# Altium PCB FLIR LWIR.PcbDoc (part 3 of 5)
Units mil, origin at the board's own origin, x right, y up, seen from the top; angles counter-clockwise.
Board outline 1511 x 3115 mil, 2 copper layers (Top Layer, Bottom Layer); 105 components, 128 nets, 625 pads, 229 vias.
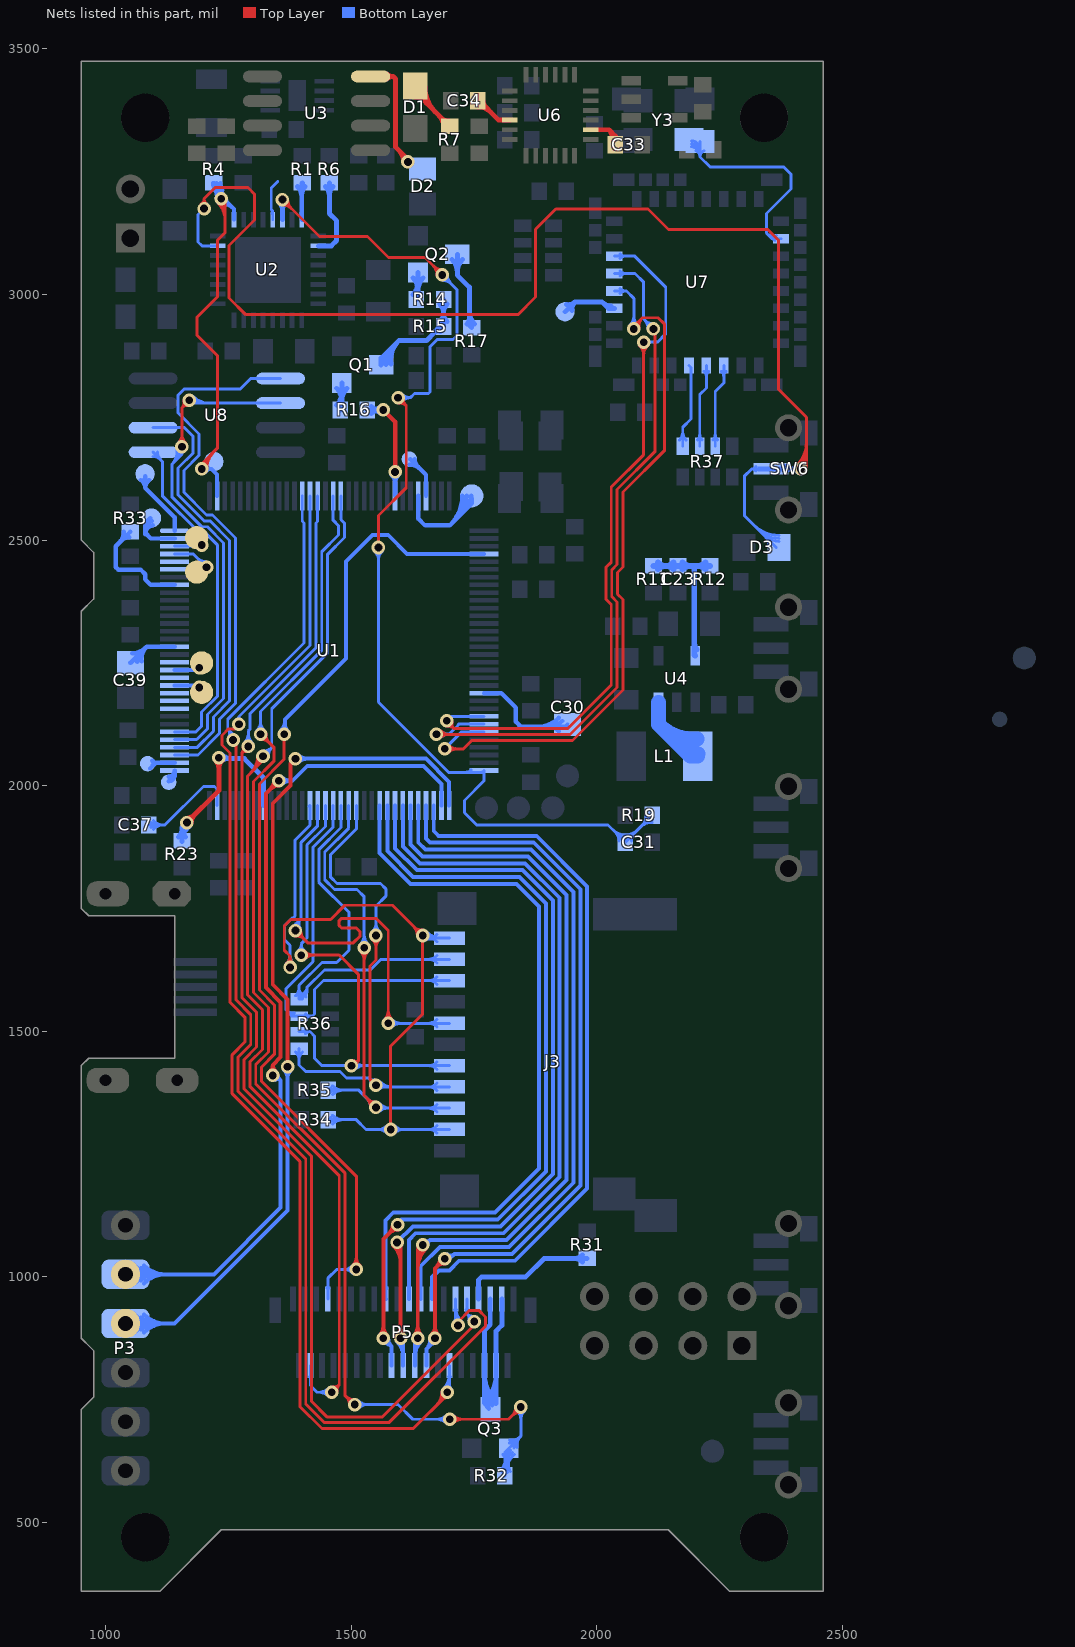
[diagram p3: the nets of this part, all layers, seen from the top]

## Via types
v1: diameter 27.56, hole 15.75, Top Layer to Bottom Layer, tented both sides, 229 vias

## Nets (pads, with @x,y where several pads share a name; then routed paths per layer and width w, separated by ;. In a path a pad name is that pad's centre, name@x,y a point inside that pad or via, vN(x,y) a via of type N, cw(c..) or ccw(c..) an arc to the next point about the centre after c; other vN are vias at no path point) (continued)
LCD_BK: Q3.1 R32.1 U1.17 | length 3293.7
  Top Layer w6: v1@1315,2094.22 cw(c1315,2068.2) 1333.4,2086.6 cw(c1351.8,2105) v1@1325.78,2105 ; v1(1315,2105) 1342.78,2077.22 1342.78,2050.56 1300.78,2008.56 1300.78,1578.85 1331,1548.63 1331,1457.98 1305.22,1432.2 1305.22,1392.81 1487.22,1210.81 1487.22,757.78 ; 1490.01,754.99 cw(c1475.02,740) v1@1496.22,740 ; v1@1505,740 1487.22,757.78 ; v1@1506.19,750.75 cw(c1504.36,774.92) 1487.22,757.78 ; v1(1700,710) 1820,710 v1(1845,735) ; v1@1707.62,702.38 cw(c1726.02,683.98) 1726.02,710 cw(c1726.02,736.02) v1@1707.62,717.62 ; v1@1834.22,735 cw(c1808.2,735) 1826.6,716.6 cw(c1845,698.2) v1@1845,724.22
  Bottom Layer w6: v1@1307.38,2112.62 ccw(c1288.98,2131.02) 1315,2131.02 ccw(c1341.02,2131.02) v1@1322.62,2112.62 ; v1@1320,2100 v1(1315,2105) 1315,2151.06 1439.63,2275.69 1439.63,2476.41 1473.78,2510.56 1473.78,2529.44 1462.87,2540.34 U1.17@1462.87,2589.96 ; v1(1507,740) 1595,740 1625,710 v1(1700,710) ; v1@1514.62,732.38 cw(c1533.02,713.98) 1533.02,740 cw(c1533.02,766.02) v1@1514.62,747.62 ; v1@1692.38,702.38 ccw(c1673.98,683.98) 1673.98,710 ccw(c1673.98,736.02) v1@1692.38,717.62 ; R32.1@1803.54,605.98 ccw(c1781.78,627.75) 1812.56,627.75 ccw(c1843.34,627.75) R32.1@1821.57,605.98 ; R32.1@1805.98,607.89 ccw(c1794.86,626.34) 1815.77,621.15 ; R32.1@1806.94,608.41 ccw(c1795.3,632.12) 1820.81,625.28 ; R32.1@1807.79,601.74 ccw(c1796.27,613.26) 1812.56,613.26 ccw(c1828.85,613.26) R32.1@1817.33,601.74 ; Q3.1@1808.1,638.61 cw(c1797.33,627.84) 1812.56,627.84 ; R32.1@1809.58,603.03 ccw(c1803.03,616.37) R32.1@1817.39,612.52 ; R32.1@1812.56,594.49 cw(c1872,594.49) Q3.1@1831.66,638.15 ; R32.1@1812.56,595 1812.56,643.07 Q3.1@1820.12,650.63 1845,675.51 ; R32.1@1812.56,608.21 cw(c1859.33,608.21) Q3.1@1827.58,642.55 ; 1812.56,621.92 cw(c1846.65,621.92) Q3.1@1823.51,646.96 ; 1814.1,614.42 ccw(c1827.53,611.09) R32.1@1817.47,601.6 ; 1816.75,625.09 ccw(c1837.03,620.06) R32.1@1821.83,605.72 ; 1820.74,625.04 ccw(c1848.36,617.64) R32.1@1823.6,603.34 ; Q3.1@1821.38,661.56 ccw(c1823.45,679.5) 1836.22,666.73 ccw(c1848.99,653.96) Q3.1@1831.05,651.89 ; Q3.1@1822.06,667.52 ccw(c1825.26,695.25) 1845,675.51 ; Q3.1@1837.01,652.58 cw(c1864.74,655.77) 1845,675.51 ; v1@1837.38,727.38 cw(c1818.98,708.98) 1845,708.98 cw(c1871.02,708.98) v1@1852.62,727.38 ; v1(1845,735) 1845,675.51
LCD_CS: P5.4 U1.18 | length 2287.6
  Top Layer w6: 1295.39,2026.61 ccw(c1262,2060) v1@1309.22,2060 ; 1305.63,2036.85 ccw(c1282.49,2060) v1@1315.22,2060 ; v1(1320,2060) 1320,2051.22 1288.78,2020 1288.78,1573.88 1319,1543.65 1319,1462.96 1293.22,1437.18 1293.22,1387.84 1475.22,1205.84 1475.22,780.22 ; v1(1460,765) 1475.22,780.22 ; v1@1461.54,775.67 ccw(c1463.84,791.6) 1475.22,780.22 ; v1@1470.67,766.54 cw(c1486.6,768.84) 1475.22,780.22
  Bottom Layer w6: v1(1320,2060) 1337.78,2077.78 ; v1@1320.27,2070.78 ccw(c1320.86,2094.7) 1337.78,2077.78 ; v1@1330.78,2060.27 cw(c1354.7,2060.86) 1337.78,2077.78 ; P5.4@1414.4,797.43 cw(c1409.44,792.47) 1416.46,792.47 cw(c1423.47,792.47) P5.4@1418.51,797.43 ; P5.4@1416.46,819.17 1416.46,778.54 1430,765 v1(1460,765) ; v1@1452.38,757.38 ccw(c1433.98,738.98) 1433.98,765 ccw(c1433.98,791.02) v1@1452.38,772.62 ; U1.18@1478.62,2589.96 1478.62,2541.56 1485.78,2534.41 1485.78,2505.59 1451.63,2471.44 1451.63,2270.72 1337.78,2156.87 1337.78,2077.78
LCD_D0: P5.17 U1.74 | length 1523.1
  Bottom Layer w8: U1.74@1557.36,1960.04 1557.36,1862.64 1620,1800 1836.41,1800 1882,1754.41 1882,1220.59 1792.19,1130.78 1585.15,1130.78 1569.22,1114.85 1569.22,955.78 P5.17@1570,955 ; 1569.22,981.17 ccw(c1576.48,981.17) P5.17@1571.35,976.03
LCD_D1: P5.18 U1.73 | length 1774.3
  Top Layer w8: v1@1558.08,881.92 ccw(c1541.39,898.61) 1565,898.61 ccw(c1588.61,898.61) v1@1571.92,881.92 ; v1(1565,875) 1565,1077 v1(1594,1106) ; v1@1584.22,1106 cw(c1560.61,1106) 1577.31,1089.31 cw(c1594,1072.61) v1@1594,1096.22
  Bottom Layer w8: v1@1565,865.22 cw(c1565,841.61) 1581.69,858.31 cw(c1598.39,875) v1@1574.78,875 ; v1(1565,875) 1581.81,858.19 P5.18@1581.81,819.17 ; U1.73@1573.11,1960.04 1573.11,1866.69 1625.8,1814 1842.21,1814 1896,1760.21 1896,1214.79 1797.99,1116.78 1601.78,1116.78 v1@1590,1105
LCD_D2: P5.20 U1.72 | length 1788.4
  Top Layer w8: v1@1586.08,1063.08 cw(c1552.49,1029.49) 1600,1029.49 ; v1@1591.74,1068.74 cw(c1571.8,1048.8) 1600,1048.8 ; v1(1593,1070) 1600,1063 v1(1600,875) ; v1@1593.08,881.92 ccw(c1576.39,898.61) 1600,898.61 ccw(c1623.61,898.61) v1@1606.92,881.92
  Bottom Layer w8: U1.72@1588.86,1960.04 1588.86,1872.54 1633.4,1828 1848.01,1828 1910,1766.01 1910,1208.99 1803.79,1102.78 1624.98,1102.78 1593,1070.8 v1(1593,1070) ; v1@1593.08,868.08 cw(c1563.28,838.28) P5.20@1605.43,838.28 ; v1@1598.74,873.74 cw(c1582.59,857.59) 1605.43,857.59 ; v1(1600,875) 1605.43,869.57 P5.20@1605.43,819.17
LCD_D3: P5.21 U1.71 | length 1494.9
  Bottom Layer w8: U1.71@1604.61,1960.04 1604.61,1876.59 1639.2,1842 1853.8,1842 1924,1771.8 1924,1203.2 1809.58,1088.78 1630.78,1088.78 1617.24,1075.24 P5.21@1617.24,955
LCD_D4: P5.22 U1.70 | length 1819.1
  Top Layer w8: v1@1628.08,881.92 ccw(c1611.39,898.61) 1635,898.61 ccw(c1658.61,898.61) v1@1641.92,881.92 ; v1(1635,875) 1635,1055 ; 1635,1017.25 cw(c1692.75,1017.25) v1@1651.92,1058.08 ; 1635,1036.56 cw(c1673.44,1036.56) v1@1646.26,1063.74 ; v1@1636.09,1060.97 cw(c1631.23,1058.77) 1635,1055 ; v1@1640.97,1056.09 ccw(c1638.77,1051.23) 1635,1055 ; v1(1645,1065) 1635,1055
  Bottom Layer w8: U1.70@1620.35,1960.04 1620.35,1880.65 1645,1856 1859.6,1856 1938,1777.6 1938,1197.4 1815.38,1074.78 1660,1074.78 ; P5.22@1629.05,819.17 1629.05,869.05 v1(1635,875) ; P5.22@1629.05,837.04 cw(c1672.96,837.04) v1@1641.92,868.08 ; 1629.05,856.35 cw(c1653.65,856.35) v1@1636.26,873.74 ; v1(1645,1065) 1650.22,1065 1660,1074.78 ; v1@1649.91,1073.46 ccw(c1654.09,1080.68) 1660,1074.78 ; v1@1654.78,1065 cw(c1665.79,1065) 1658,1072.78
LCD_D5: P5.23 U1.69 | length 1473.1
  Bottom Layer w8: U1.69@1636.1,1960.04 1636.1,1884.7 1650.8,1870 1865.4,1870 1952,1783.4 1952,1191.6 1821.18,1060.78 1680.15,1060.78 1640.87,1021.5 P5.23@1640.87,955
LCD_D6: P5.24 U1.68 | length 1716.6
  Top Layer w8: v1@1663.08,881.92 ccw(c1646.39,898.61) 1670,898.61 ccw(c1693.61,898.61) v1@1676.92,881.92 ; v1(1670,875) 1670,1017 v1(1690,1037) ; v1@1680.22,1037 cw(c1656.61,1037) 1673.31,1020.31 cw(c1690,1003.61) v1@1690,1027.22
  Bottom Layer w8: U1.68@1651.85,1960.04 1651.85,1892.15 1660,1884 1871.2,1884 1966,1789.2 1966,1185.8 1826.98,1046.78 1710,1046.78 ; P5.24@1652.68,819.17 1652.68,852.68 ; v1@1660.27,874.01 cw(c1634.02,871.34) 1652.68,852.68 ; 1661.84,861.84 cw(c1670,853.68) v1@1670,865.22 ; v1@1670,870 1652.68,852.68 ; v1(1690,1037) 1700.22,1037 1710,1046.78 ; v1@1695.31,1045.22 ccw(c1701.68,1055.09) 1710,1046.78
LCD_D7: P5.25 U1.67 | length 1461.4
  Bottom Layer w8: P5.25@1664.49,955 1664.49,999.49 1678.22,1013.22 1699.85,1013.22 1719.41,1032.78 1832.78,1032.78 1980,1180 1980,1795 1877,1898 1677,1898 1667.6,1907.4 U1.67@1667.6,1960.04
LCD_RD: P5.29 U1.13 | length 2722.2
  Top Layer w6: v1@1264.78,2087.22 1264.78,1563.93 1295,1533.71 1295,1472.9 1269.22,1447.12 1269.22,1377.9 1407,1240.12 1407,741.03 1445.03,703 1576.22,703 1772.78,899.56 1772.78,918.44 1759.44,931.78 1740.56,931.78 1717,908.22 v1@1717,902 ; v1@1715,900 v1@1717,902 ; v1(1717,901) v1@1717,902
  Bottom Layer w6: v1@1249.97,2098.88 ccw(c1238.8,2106.15) 1248.22,2115.56 ; 1253.45,2110.33 cw(c1245.14,2102.02) v1@1254.99,2095.61 ; v1(1259,2093) 1259,2104.78 1248.22,2115.56 ; U1.13@1399.88,2589.96 1399.88,2538.75 1403.63,2535 1403.63,2290.6 1248.22,2135.19 1248.22,2115.56 ; v1@1709.38,908.62 ccw(c1703.69,914.31) 1711.73,914.31 ; P5.29@1709.68,933.26 cw(c1704.72,928.3) 1711.73,928.3 cw(c1718.75,928.3) P5.29@1713.79,933.26 ; 1711.73,925.26 ccw(c1741.26,925.26) v1@1720.38,904.38 ; P5.29@1711.73,939.74 ccw(c1755.74,939.74) v1@1724.62,908.62 ; P5.29@1711.73,955 1711.73,906.27 v1(1717,901)
LCD_RESET: P5.31 U1.15 | length 2572
  Top Layer w6: v1@1279.58,2077.22 cw(c1269.13,2074.43) 1276.78,2066.78 ; v1@1287.22,2069.58 ccw(c1284.43,2059.13) 1276.78,2066.78 ; v1(1290,2080) 1276.78,2066.78 ; v1(1750,909) 1750,901.78 1563.22,715 1450,715 1419,746 1419,1245.09 1281.22,1382.87 1281.22,1442.15 1307,1467.93 1307,1538.68 1276.78,1568.9 1276.78,2066.78
  Bottom Layer w6: v1@1282.38,2087.62 ccw(c1263.98,2106.02) 1290,2106.02 ccw(c1316.02,2106.02) v1@1297.62,2087.62 ; v1(1290,2080) 1290,2111.78 1293.78,2115.56 1293.78,2146.81 1315,2168.03 1427.63,2280.66 1427.63,2535 1431.38,2538.75 U1.15@1431.38,2589.96 ; P5.31@1733.3,933.26 cw(c1728.34,928.3) 1735.35,928.3 cw(c1742.37,928.3) P5.31@1737.41,933.26 ; P5.31@1735.35,955 1735.35,924.65 ; v1@1739.43,911.13 ccw(c1724.8,914.09) 1735.35,924.65 ; v1@1748.99,919.73 cw(c1747.4,936.69) 1735.36,924.64 ; v1@1750,910 1735.35,924.65
LCD_RS: P5.7 U1.36 | length 2173
  Top Layer w6: v1(1363,2105) 1363,2053.81 1312.78,2003.59 1312.78,1583.82 1343,1553.6 1343,1453.01 1317.22,1427.23 1317.22,1397.78 1510,1205 v1(1510,1015) ; v1@1502.38,1022.62 ccw(c1483.98,1041.02) 1510,1041.02 ccw(c1536.02,1041.02) v1@1517.62,1022.62
  Bottom Layer w6: P5.7@1449.84,976.74 ccw(c1444.88,981.7) 1451.89,981.7 ccw(c1458.9,981.7) P5.7@1453.94,976.74 ; P5.7@1451.89,955 1451.89,996.89 1470,1015 v1(1510,1015) ; v1@1502.38,1007.38 ccw(c1483.98,988.98) 1483.98,1015 ccw(c1483.98,1041.02) v1@1502.38,1022.62
  Bottom Layer w8: v1@1356.08,2111.92 ccw(c1334.56,2133.44) 1365,2133.44 ; v1@1365,2105 1365,2135 1488.63,2258.63 1488.63,2456.12 1542.51,2510 1575,2510 1613.15,2471.85 U1.36@1769.96,2471.85 ; 1365,2123.78 ccw(c1381.78,2123.78) v1@1369.92,2111.92
LCD_WR: P5.28 U1.14 | length 2574.9
  Top Layer w6: v1(1271,2125) 1261.78,2115.78 1249.56,2115.78 1236.22,2102.44 1236.22,2082.99 1252.78,2066.44 1252.78,1558.96 1283,1528.74 1283,1477.87 1257.22,1452.09 1257.22,1372.93 1395,1235.15 1395,736.06 1440.06,691 1626,691 v1@1695,760 ; 1673.06,738.06 ccw(c1646.13,765) v1@1684.22,765 ; 1683.31,748.31 ccw(c1666.61,765) v1@1690.22,765 ; 1685.13,750.13 cw(c1695,740.27) v1@1695,754.22
  Bottom Layer w6: v1@1266.95,2134.99 ccw(c1264.52,2141) 1271,2141 ; v1(1271,2125) 1271,2141 ; v1@1275.05,2134.99 cw(c1277.48,2141) 1271,2141 ; U1.14@1415.63,2589.96 1415.63,2285.63 1271,2141 ; v1@1687.38,772.62 ccw(c1657.1,802.9) P5.28@1699.92,802.9 ; v1@1691.62,768.38 ccw(c1671.58,788.42) 1699.92,788.42 ; v1(1695,765) 1699.92,769.92 P5.28@1699.92,819.17 ; P5.28@1697.87,797.43 cw(c1692.91,792.47) 1699.92,792.47 cw(c1706.93,792.47) P5.28@1701.97,797.43 ; 1699.92,779.15 ccw(c1709.15,779.15) v1@1702.62,772.62
LED-: P5.34 P5.35 P5.36 P5.37 Q3.2 | length 661
  Bottom Layer w10: Q3.2@1770.79,742.96 P5.34@1770.79,819.17 1770.79,890.79 1782.6,902.6 P5.35@1782.6,955 ; Q3.2@1770.79,753.33 ccw(c1800.82,753.33) Q3.2@1779.58,732.09 ; 1770.79,777.47 ccw(c1824.96,777.47) Q3.2@1786.65,739.17 ; P5.34@1770.79,801.62 ccw(c1849.1,801.62) Q3.2@1793.72,746.24 ; Q3.2@1772.51,746.24 ccw(c1719.65,799.1) P5.36@1794.41,799.1 ; Q3.2@1779.58,739.17 ccw(c1743.79,774.96) 1794.41,774.96 ; Q3.2@1794.41,741.92 P5.36@1794.41,819.17 1794.41,889.41 1806.22,901.22 P5.37@1806.22,955
MCLK: U7.26 Y3.3 | length 574.2
  Bottom Layer w6: Y3.3@2192.29,3300.89 cw(c2191.52,3282.62) 2209.8,3282.62 ; Y3.3@2192.54,3306.89 cw(c2191.78,3288.88) Y3.3@2209.8,3288.88 ; Y3.3@2192.79,3312.88 cw(c2192.05,3295.14) Y3.3@2209.8,3295.14 ; Y3.3@2201.56,3292.79 cw(c2196.06,3280.2) 2209.8,3280.2 ; Y3.3@2209.8,3311.69 2209.8,3280.2 ; Y3.3@2218.05,3292.79 ccw(c2223.54,3280.2) 2209.8,3280.2 ; 2351.87,3118.13 ccw(c2362.83,3129.09) U7.26@2367.73,3114.38 ; U7.26@2362,3110.28 ccw(c2356.42,3107.21) 2356.42,3113.58 ; U7.26@2362,3116.88 cw(c2356.42,3119.95) 2356.42,3113.58 ; U7.26@2365.83,3120.08 cw(c2359.4,3139.4) 2345,3125 ; U7.26@2374.68,3113.58 2356.42,3113.58 ; 2209.8,3280.2 2230,3260 2380,3260 2395,3245 2395,3215 2345,3165 2345,3125 ; 2345,3125 2356.42,3113.58
MCU_RST: C31.1 R19.1 U1.64 U2.30 | length 2734.5
  Top Layer w6: v1@1359.53,3182.69 cw(c1359.53,3157.19) 1377.56,3175.22 ; v1(1359.53,3193.47) 1359.53,3193.26 1434.78,3118 1532.81,3118 1575.59,3075.22 1649.78,3075.22 v1(1685,3040) ; v1@1370.31,3193.47 ccw(c1396.85,3193.47) 1378.08,3174.7 ; v1(1555,2485) 1555,2550 1611.64,2606.64 1611.64,2773.36 ; v1(1595,2790) 1611.64,2773.36 ; v1@1595.8,2779.25 cw(c1597.29,2759.02) 1611.64,2773.36 ; v1@1605.75,2789.2 ccw(c1625.98,2787.71) 1611.64,2773.36 ; v1@1674.22,3040 ccw(c1648.2,3040) 1666.6,3058.4 ccw(c1685,3076.8) v1@1685,3050.78
  Bottom Layer w6: v1@1547.38,2477.38 cw(c1528.98,2458.98) 1555,2458.98 cw(c1581.02,2458.98) v1@1562.62,2477.38 ; v1@1555,2490 v1(1555,2485) 1555,2170 1697.78,2027.22 1766.28,2027.22 U1.64@1769.96,2030.91 1769.96,2009.96 1730,1970 1730,1945 1755,1920 2022.44,1920 C31.1@2057.44,1885 2057.56,1885 R19.1@2112.56,1940 ; v1(1595,2790) 1620,2790 ; v1@1602.84,2782.6 cw(c1620,2766.4) 1620,2790 ; v1@1602.84,2797.4 ccw(c1620,2813.6) 1620,2790 ; v1@1685,3029.22 cw(c1685,3003.2) 1703.4,3021.6 cw(c1721.8,3040) v1@1695.78,3040 ; v1(1685,3040) 1715,3010 1715,2916.25 1707.04,2908.28 1674.54,2908.28 1660,2893.74 1660,2801.37 1656.92,2798.28 1628.28,2798.28 1620,2790 ; 1732.1,2027.22 ccw(c1732.1,2043.97) U1.64@1743.94,2032.12 ; 2032.32,1910.12 ccw(c2057.44,1935.25) 2057.44,1899.72 ccw(c2057.44,1935.53) 2082.76,1910.21 ; 2037.07,1905.37 cw(c2018.67,1886.97) C31.1@2044.69,1886.97 ; C31.1@2042.56,1899.88 ccw(c2057.44,1914.76) 2057.44,1893.72 ccw(c2057.44,1915.04) C31.1@2072.52,1899.96 ; C31.1@2070.19,1886.97 cw(c2095.93,1886.97) 2077.73,1905.17 ; 2087.44,1914.88 cw(c2112.56,1889.75) R19.1@2112.56,1925.28 ; 2092.19,1919.63 ccw(c2073.79,1938.03) R19.1@2099.81,1938.03 ; R19.1@2097.68,1925.12 cw(c2112.56,1910.24) R19.1@2112.56,1931.28
  Bottom Layer w10: v1@1353.32,3187.26 cw(c1338.33,3172.28) 1359.53,3172.28 cw(c1380.72,3172.28) v1@1365.74,3187.26 ; U2.30@1359.53,3152.41 v1(1359.53,3193.47)
MEASURE_CTRL: R16.2 U1.25 | length 373.4
  Top Layer w9: v1(1565,2765) 1588.86,2741.14 v1(1588.86,2638.86)
  Bottom Layer w9: R16.2@1532.56,2765 v1(1565,2765) ; R16.2@1540.51,2757.05 cw(c1559.71,2737.84) 1559.71,2765 cw(c1559.71,2792.16) R16.2@1540.51,2772.95 ; v1@1556.56,2761.15 ccw(c1545.19,2755.95) 1548.43,2768.02 ccw(c1550.83,2776.99) v1@1557.92,2770.99 ; v1@1556.56,2768.85 cw(c1545.19,2774.05) 1548.43,2761.98 cw(c1550.83,2753.01) v1@1557.92,2759 ; v1@1558.44,2758.44 ccw(c1542.6,2742.6) 1542.6,2765 ccw(c1542.6,2787.4) v1@1558.44,2771.56 ; v1@1582.3,2632.3 cw(c1566.46,2616.46) 1588.86,2616.46 cw(c1611.26,2616.46) v1@1595.42,2632.3 ; U1.25@1588.86,2589.96 v1(1588.86,2638.86)
NetC23_2: C23.2 R11.1 R12.2 U4.5 | length 456.9
  Bottom Layer w12: R11.1@2115,2447.56 R12.2@2230,2447.56 ; R11.1@2123.86,2440.67 cw(c2140.5,2424.03) 2140.5,2447.56 cw(c2140.5,2471.09) R11.1@2123.86,2454.45 ; C23.2@2156.14,2440.67 ccw(c2139.5,2424.03) 2139.5,2447.56 ccw(c2139.5,2471.09) C23.2@2156.14,2454.45 ; C23.2@2173.86,2440.67 cw(c2190.5,2424.03) 2190.5,2447.56 cw(c2190.5,2471.09) C23.2@2173.86,2454.45 ; 2198,2288.44 ccw(c2214.11,2288.44) U4.5@2202.72,2277.05 ; 2198,2445 2198,2266.49 U4.5@2200,2264.49 ; R12.2@2221.14,2440.67 ccw(c2204.5,2424.03) 2204.5,2447.56 ccw(c2204.5,2471.09) R12.2@2221.14,2454.45
NetC30_2: C30.2 U1.54 | length 321.1
  Bottom Layer w9: U1.54@1769.96,2188.39 1805.4,2188.39 1835,2158.79 1835,2130 1845,2120 1935.43,2120 C30.2@1940,2124.57 ; 1878.87,2120 ccw(c1878.87,2181.76) C30.2@1922.54,2138.09 ; 1900.6,2120 ccw(c1900.6,2160.03) C30.2@1928.91,2131.72 ; 1900.92,2120 cw(c1900.92,2089.43) C30.2@1922.54,2111.05
NetC33_2: C33.2 U6.20 | length 118.2
  Top Layer w10: U6.20@1987.72,3335.47 2024.53,3335.47 ; C33.2@2027.97,3312.06 ccw(c2010.5,3321.45) 2024.53,3335.47 ; 2034.04,3325.96 cw(c2022.88,3314.8) C33.2@2036.78,3307.32 ; C33.2@2037.44,3305 2037.44,3322.56 2024.53,3335.47
NetC34_2: C34.2 U6.10 | length 122
  Top Layer w10: C34.2@1757.56,3382.28 cw(c1757.56,3345.69) 1783.43,3371.57 ; C34.2@1757.56,3395 1760,3395 1799.84,3355.16 U6.10@1822.28,3355.16 ; C34.2@1768.31,3393.03 ccw(c1783.61,3393.03) C34.2@1772.79,3382.21
NetC37_2: C37.2 U1.95 | length 281
  Bottom Layer w6: C37.2@1087.56,1920 1120,1920 1198.57,1998.57 1221.43,1998.57 1226.65,1993.35 U1.95@1226.65,1960.04 ; C37.2@1092.33,1915.23 cw(c1103.85,1903.71) 1103.85,1920 cw(c1103.85,1936.29) C37.2@1092.33,1924.77 ; C37.2@1096.57,1910.99 cw(c1118.34,1889.22) 1118.34,1920 cw(c1118.34,1950.78) C37.2@1096.57,1929.01
NetC39_1: C39.1 U1.113 | length 185.6
  Bottom Layer w9: C39.1@1050,2250.43 1050.43,2250.43 1082.87,2282.87 ; C39.1@1053.94,2269.56 ccw(c1053.94,2307.26) 1080.6,2280.6 ; C39.1@1063.96,2251.83 cw(c1085.37,2254.8) C39.1@1070.09,2270.09 ; C39.1@1072.88,2253.07 cw(c1107.82,2257.93) 1082.87,2282.87 ; U1.113@1140.04,2282.87 1082.87,2282.87
NetD1_1: D1.1 R7.1 | length 265.6
  Top Layer w10: D1.1@1629.94,3402.41 cw(c1629.94,3377.75) 1647.37,3395.19 ; D1.1@1629.94,3424.97 1629.94,3412.62 R7.1@1700,3342.56 ; D1.1@1639.94,3422.41 ccw(c1687.7,3422.41) 1653.93,3388.63 ; D1.1@1649.94,3422.41 ccw(c1721.85,3422.41) 1671,3371.56 ; 1678.29,3364.27 cw(c1656.58,3342.56) R7.1@1687.28,3342.56 ; 1683.04,3359.52 ccw(c1698.03,3374.5) R7.1@1698.03,3353.31
NetD2_2: D2.2 U3.8 | length 285.1
  Top Layer w10: U3.8@1539,3444 1584.94,3444 1590,3438.94 1590,3300.04 1615,3275.04 v1(1615,3270) ; U3.8@1571.95,3439.05 cw(c1583.9,3427.1) 1583.9,3444 cw(c1583.9,3460.9) U3.8@1571.95,3448.95 ; 1596.45,3293.6 cw(c1572.85,3270) v1@1606.22,3270
NetL1_1: L1.1 U4.3 | length 275.9
  Bottom Layer w30: U4.3@2125.2,2170 2125.2,2124.8 ; 2172.22,2077.78 ccw(c2203.21,2108.77) L1.1@2205.93,2065.03 ; L1.1@2204.07,2094.97 cw(c2197.69,2197.29) 2125.2,2124.8 ; L1.1@2205,2060 2190,2060 2125.2,2124.8
NetP5_33: P5.33 R31.2 | length 318.6
  Bottom Layer w10: P5.33@1758.98,955 1758.98,993.76 1765,999.78 1854.78,999.78 1892.44,1037.44 R31.2@1980,1037.44 ; R31.2@1970.43,1029.84 ccw(c1952.08,1011.49) 1952.08,1037.44 ccw(c1952.08,1063.39) R31.2@1970.43,1045.04
NetQ1_1: Q1.1 R16.1 | length 153.8
  Bottom Layer w10: R16.1@1469.84,2774.57 ccw(c1443.79,2800.62) Q1.1@1480.63,2800.62 ; Q1.1@1470.02,2809.28 cw(c1444.42,2783.67) 1480.63,2783.67 cw(c1516.84,2783.67) Q1.1@1491.24,2809.28 ; R16.1@1477.44,2765 1480.63,2768.19 Q1.1@1480.63,2819.88 ; 1480.63,2785.22 ccw(c1495.69,2785.22) R16.1@1485.04,2774.57
NetQ1_3: Q1.3 R14.2 R15.2 | length 442.8
  Bottom Layer w10: Q1.3@1560.63,2856.88 1560.63,2870.63 1596.28,2906.28 ; Q1.3@1560.68,2856.18 cw(c1586.12,2859.78) 1567.95,2877.95 ; Q1.3@1570.58,2857.58 cw(c1610.94,2863.29) 1582.12,2892.12 ; Q1.3@1580.48,2858.98 cw(c1635.76,2866.81) 1596.28,2906.28 ; R15.2@1679.96,2944.57 ccw(c1661.61,2962.92) 1687.56,2962.92 ccw(c1713.51,2962.92) R15.2@1695.16,2944.57 ; R14.2@1679.96,2980.43 cw(c1661.61,2962.08) 1687.56,2962.08 cw(c1713.51,2962.08) R14.2@1695.16,2980.43 ; R15.2@1680.47,2924.95 ccw(c1675.22,2918.97) 1669.59,2924.59 ; R15.2@1681.44,2924.2 ccw(c1676.15,2916.57) 1669.59,2923.13 ; R14.2@1687.56,2990 R15.2@1687.56,2935 1680,2935 1669.59,2924.59 ; 1596.28,2906.28 1652.75,2906.28 1669.59,2923.13 ; 1669.59,2923.13 1669.59,2924.59
NetQ2_1: Q2.1 R14.1 | length 153.8
  Bottom Layer w10: R14.1@1624.84,2999.57 ccw(c1598.79,3025.62) Q2.1@1635.63,3025.62 ; Q2.1@1625.02,3034.28 cw(c1599.42,3008.67) 1635.63,3008.67 cw(c1671.84,3008.67) Q2.1@1646.24,3034.28 ; R14.1@1632.44,2990 1635.63,2993.19 Q2.1@1635.63,3044.88 ; 1635.63,3010.22 ccw(c1650.69,3010.22) R14.1@1640.04,2999.57
NetQ2_3: Q2.3 R17.2 | length 259.1
  Bottom Layer w10: Q2.3@1705.02,3071.28 cw(c1679.42,3045.67) 1715.63,3045.67 cw(c1751.84,3045.67) Q2.3@1726.24,3071.28 ; Q2.3@1715.63,3081.88 1715.63,3039.37 1740,3015 1740,2937.56 R17.2@1745,2932.56 ; R17.2@1735.43,2940.16 ccw(c1724.4,2951.19) 1740,2951.19 ; 1740,2965.83 ccw(c1776.3,2965.83) R17.2@1750.63,2940.16
NetR1_1: R1.1 U2.32 | length 116.2
  Bottom Layer w10: R1.1@1390.43,3219.84 cw(c1369.99,3199.4) 1398.9,3199.4 ; U2.32@1398.9,3152.41 1398.9,3226.34 R1.1@1400,3227.44 ; 1398.9,3203.58 cw(c1421.89,3203.58) R1.1@1405.63,3219.84
NetR6_1: R6.1 U2.2 | length 206.5
  Bottom Layer w10: U2.2@1432.41,3099.21 1459.21,3099.21 1470,3110 1470,3150 1455,3165 R6.1@1455,3227.44 ; R6.1@1447.4,3219.84 cw(c1429.05,3201.49) 1455,3201.49 cw(c1480.95,3201.49) R6.1@1462.6,3219.84
NetR23_2: R23.2 U1.89 | length 578.5
  Top Layer w10: v1(1165,1925) 1230,1990 v1(1230,2057) ; v1@1165,1933.78 ccw(c1165,1954.98) 1179.99,1939.99 ccw(c1194.98,1925) v1@1173.78,1925 ; v1@1223.79,2050.79 cw(c1208.8,2035.8) 1230,2035.8 cw(c1251.2,2035.8) v1@1236.21,2050.79
  Bottom Layer w10: R23.2@1147.4,1895.16 ccw(c1129.05,1913.51) 1155,1913.51 ccw(c1180.95,1913.51) R23.2@1162.6,1895.16 ; R23.2@1155,1886.25 cw(c1195.59,1886.25) v1@1170.44,1918.11 ; R23.2@1155,1887.56 1155,1915 v1(1165,1925) ; 1155,1906.88 cw(c1179.3,1906.88) v1@1164.24,1925.96 ; 1155.13,1913.99 cw(c1174.33,1908.84) v1@1164.39,1926.06 ; v1@1230,2055 1281.92,2055 1321.14,2015.78 U1.89@1321.14,1960.04 ; v1@1236.21,2050.79 cw(c1246.37,2040.63) 1246.37,2055 ; v1@1236.21,2063.21 ccw(c1256.02,2083.02) 1256.02,2055
NetR33_1: R33.1 U1.121 | length 268.8
  Bottom Layer w9: 1027.44,2494.88 ccw(c1004.88,2517.44) R33.1@1036.78,2517.44 ; 1032.19,2499.63 cw(c1048.03,2483.79) R33.1@1048.03,2506.19 ; R33.1@1050,2517.44 1020,2487.44 1020,2445 1025,2440 1070.75,2440 1080,2430.75 1080,2420 1091.14,2408.86 U1.121@1140.04,2408.86
NetR37_5: R37.5 U7.5 | length 209.6
  Bottom Layer w6: R37.5@2167.68,2703.34 ccw(c2150.96,2720.07) 2174.61,2720.07 ccw(c2198.25,2720.07) R37.5@2181.53,2703.34 ; R37.5@2174.61,2691.5 2174.61,2729.61 2191.36,2746.36 2191.36,2851.24 U7.5@2187.28,2855.32
NetR37_6: R37.6 U7.4 | length 221.3
  Bottom Layer w6: R37.6@2204.41,2704.21 ccw(c2192.73,2715.89) 2209.25,2715.89 ccw(c2225.77,2715.89) R37.6@2214.09,2704.21 ; R37.6@2209.25,2691.5 2209.25,2796.54 2222.72,2810 U7.4@2222.72,2855.32 ; U7.4@2217.88,2843.78 cw(c2206.2,2832.1) 2222.72,2832.1 cw(c2239.24,2832.1) U7.4@2227.55,2843.78
NetR37_7: R37.7 U7.3 | length 222.9
  Bottom Layer w6: R37.7@2235.91,2704.21 ccw(c2224.23,2715.89) 2240.75,2715.89 ccw(c2257.27,2715.89) R37.7@2245.59,2704.21 ; R37.7@2240.75,2691.5 2240.75,2802.6 2258.15,2820 U7.3@2258.15,2855.32 ; U7.3@2253.31,2843.78 cw(c2241.63,2832.1) 2258.15,2832.1 cw(c2274.67,2832.1) U7.3@2262.99,2843.78
PD14: U1.111
PE0: U1.106
PE1: U1.105
PH8: U1.107
PH9: pad.1@1195,2190 U1.108 | length 51.7
  Bottom Layer w8: U1.108@1140.04,2204.13 1185.87,2204.13 v1(1190,2200)
PH10: U1.109
PH11: pad.1@1195,2250 U1.110 | length 51.8
  Bottom Layer w8: U1.110@1140.04,2235.63 1185.63,2235.63 v1(1190,2240)
PWR_EN: pad.1@1220,2660 R4.2 U1.2 U2.25 | length 1203.7
  Top Layer w6: v1@1193.78,2645 cw(c1214.98,2645) 1199.99,2659.99 ; v1(1195,2645) 1195,2655 1227,2687 1227,2876.03 1185.22,2917.81 1185.22,2953.03 1227,2994.81 1227,3110 1242.78,3125.78 1242.78,3187.22 v1(1235,3195) ; v1@1199.78,2645 cw(c1235.46,2645) 1210.23,2670.23 ; v1@1205.78,2645 cw(c1255.95,2645) 1220.47,2680.47 ; v1@1227.38,3187.38 cw(c1190.19,3150.19) 1242.78,3150.19 ; v1@1231.62,3191.62 cw(c1204.68,3164.68) 1242.78,3164.68 ; v1@1235.86,3195.86 cw(c1219.16,3179.16) 1242.78,3179.16
  Bottom Layer w8: v1(1195,2645) pad.1@1215,2645 ; v1@1202.72,2638.99 cw(c1215,2629.44) pad.1@1215,2645 ; pad.1@1202.72,2651.01 ccw(c1215,2660.56) pad.1@1215,2645 ; R4.2@1217.72,3227.44 ccw(c1242.24,3227.44) 1224.9,3210.1 ; R4.2@1220,3227.44 R4.2@1220,3215 ; v1@1225.42,3196.96 ccw(c1205.95,3200.94) R4.2@1220,3215 ; R4.2@1225.72,3227.44 ccw(c1269.55,3227.44) v1@1238.56,3196.44 ; U1.2@1226.65,2589.96 1226.65,2633.35 pad.1@1215,2645 ; 1226.84,3208.16 ccw(c1235,3216.32) v1@1235,3204.78 ; v1@1227.34,3201.08 ccw(c1218.18,3208.35) R4.2@1228.31,3214.19 ; 1231.08,3209.4 ccw(c1240.28,3214.72) v1@1237.53,3204.45 ; v1@1231.17,3204 ccw(c1227.34,3212.99) R4.2@1236.8,3215.42 ; R4.2@1233.72,3227.44 ccw(c1296.87,3227.44) 1252.21,3182.79 ; v1@1235,3185.22 cw(c1235,3149.54) 1260.23,3174.77 ; v1@1238.3,3185.8 cw(c1242.77,3173.36) 1253.33,3181.29 ; v1@1244.78,3195 ccw(c1256.32,3195) 1248.16,3186.84 ; U2.25@1261.1,3152.41 1261.1,3173.9 R4.2@1220,3215
PWR_KEY: D3.1 SW6.2 U2.23 | length 3019.2
  Top Layer w6: v1@1194.07,3184 ccw(c1186.84,3195) 1200,3195 ; v1(1200,3175) 1200,3195 ; v1@1205.93,3184 cw(c1213.16,3195) 1200,3195 ; v1@2407.38,2652.62 ccw(c2361.07,2698.93) 2426.56,2698.93 ; v1@2411.62,2648.38 ccw(c2375.56,2684.44) 2426.56,2684.44 ; v1(2415,2645) 2426.56,2656.56 ; v1@2415.86,2644.14 ccw(c2390.04,2669.96) 2426.56,2669.96 ; v1@2419,2655.01 ccw(c2421.61,2661.51) 2426.56,2656.56 ; v1@2420.11,2639.89 ccw(c2404.53,2655.47) 2426.56,2655.47 ; v1@2425.01,2649 cw(c2431.51,2651.61) 2426.56,2656.56 ; 1200,3195 1222.78,3217.78 1289.44,3217.78 1302.78,3204.44 1302.78,3151.84 1251,3100.06 1251,2993 1285,2959 1839,2959 1875,2995 1875,3132.78 1916.21,3174 2103.79,3174 2145.56,3132.22 2347.78,3132.22 2370,3110 2370,2806.56 2426.56,2750 2426.56,2656.56
  Bottom Layer w6: v1(1200,3175) 1187.89,3162.89 1187.89,3107.11 1195.79,3099.21 U2.23@1227.59,3099.21 ; 2319.23,2530.77 ccw(c2370.43,2581.97) D3.1@2370.43,2509.56 ; SW6.2@2323.48,2640.31 ccw(c2315,2634.98) 2315,2645 ; SW6.2@2323.48,2649.69 cw(c2315,2655.02) 2315,2645 ; 2329.48,2520.52 ccw(c2370.43,2561.48) D3.1@2370.43,2503.56 ; SW6.2@2330,2645 2315,2645 ; 2339.72,2510.28 ccw(c2370.43,2541) D3.1@2370.43,2497.56 ; 2341.85,2508.15 cw(c2322.65,2488.94) D3.1@2349.81,2488.94 ; D3.1@2365,2485 2300,2550 2300,2630 2315,2645
  Bottom Layer w10: SW6.2@2330,2645 SW6.2@2354.57,2645 v1(2415,2645) ; SW6.2@2383.01,2640.18 cw(c2394.63,2628.56) 2394.63,2645 cw(c2394.63,2661.44) SW6.2@2383.01,2649.82 ; v1@2408.79,2638.79 ccw(c2393.8,2623.8) 2393.8,2645 ccw(c2393.8,2666.2) v1@2408.79,2651.21
PWR_ON: U2.29 | length 94.1
  Bottom Layer w6: U2.29@1338.14,3164.12 ccw(c1331.31,3167.66) 1336.75,3173.09 ; U2.29@1339.84,3152.41 1339.84,3170 1336.75,3173.09 ; 1350,3230 1336.75,3216.75 1336.75,3173.09
SDIO_CLK: J3.5 U1.82 | length 1129.3
  Top Layer w6: v1@1386,1694.22 cw(c1386,1668.2) 1404.4,1686.6 cw(c1422.8,1705) v1@1396.78,1705 ; v1(1386,1705) 1411,1680 1503.78,1680 1517.78,1693.99 1517.78,1702.22 1510,1710 1480,1710 1475,1715 1475,1725 1480,1730 1550,1730 1575,1705 v1(1575,1516.25) v1@1575,1515 ; v1@1567.38,1523.87 ccw(c1548.98,1542.27) 1575,1542.27 ccw(c1601.02,1542.27) v1@1582.62,1523.87
  Bottom Layer w6: v1@1384.95,1704.38 cw(c1395.33,1710.56) 1386.79,1719.09 ; v1@1386,1710 1386,1718.31 1397.69,1730 ; v1@1390.11,1707.45 cw(c1402.16,1714.63) 1392.24,1724.55 ; v1@1395.26,1710.52 cw(c1409,1718.7) 1397.69,1730 ; U1.82@1431.38,1960.04 1431.38,1918.35 1397.69,1884.66 1397.69,1730 ; v1(1575,1516.25) J3.5@1699.64,1516.25 ; v1@1582.62,1508.63 cw(c1601.02,1490.23) 1601.02,1516.25 cw(c1601.02,1542.27) v1@1582.62,1523.87 ; 1655.38,1516.25 ccw(c1655.38,1543.52) J3.5@1674.66,1524.24 ; 1657.14,1516.25 cw(c1657.14,1491.47) J3.5@1674.66,1508.99
SDIO_CMD: J3.2 R36.2 U1.81 | length 1209
  Top Layer w6: v1(1398,1655) 1475,1655 1514,1616 1514,1440 ; v1@1405.62,1647.38 cw(c1424.02,1628.98) 1424.02,1655 cw(c1424.02,1681.02) v1@1405.62,1662.62 ; v1(1500,1430) 1504,1430 1514,1440 ; v1@1505.78,1439.1 ccw(c1509.33,1444.67) 1514,1440 ; v1@1510.74,1430.98 cw(c1521.99,1432.01) 1514,1440
  Bottom Layer w6: v1@1391.1,1663.28 ccw(c1378.86,1678) 1398,1678 ; R36.2@1393.5,1499.25 1415.75,1499.25 ; v1(1398,1655) 1398,1678 ; v1@1404.9,1663.28 cw(c1417.14,1678) 1398,1678 ; R36.2@1406.69,1494.94 cw(c1415.75,1487.59) 1415.75,1499.25 ; R36.2@1406.69,1503.56 ccw(c1415.75,1510.92) 1415.75,1499.25 ; U1.81@1447.13,1960.04 1447.13,1917.13 1409.69,1879.69 1409.69,1689.69 1398,1678 ; v1@1507.62,1422.38 cw(c1526.02,1403.98) 1526.02,1430 cw(c1526.02,1456.02) v1@1507.62,1437.62 ; J3.2@1674.66,1422.38 ccw(c1656.26,1403.98) 1656.26,1430 ccw(c1656.26,1456.02) J3.2@1674.66,1437.62 ; J3.2@1700,1430 v1(1500,1430) 1440,1430 1425,1445 1425,1490 1415.75,1499.25
SDIO_D0: J3.7 R36.3 U1.80 | length 951.9
  Bottom Layer w6: 1375.06,1534.94 ccw(c1383.55,1543.43) R36.3@1385.49,1531.58 ; R36.3@1384.52,1537.5 cw(c1381.22,1557.65) 1366.79,1543.21 ; R36.3@1406.22,1525.91 cw(c1417.9,1514.23) 1417.9,1530.75 cw(c1417.9,1547.27) R36.3@1406.22,1535.59 ; U1.80@1462.87,1960.04 1462.87,1915.9 1421.69,1874.72 1421.69,1641.69 1366.79,1586.79 1366.79,1543.21 ; J3.7@1674.66,1595.61 ccw(c1656.26,1577.2) 1656.26,1603.23 ccw(c1656.26,1629.25) J3.7@1674.66,1610.85 ; J3.7@1700,1603.23 1443.23,1603.23 1425,1585 1425,1535 1420.75,1530.75 R36.3@1393.5,1530.75 1379.25,1530.75 1366.79,1543.21
SDIO_D1: J3.8 R36.4 U1.79 | length 986.8
  Bottom Layer w6: R36.4@1386.58,1572.32 ccw(c1369.86,1589.04) 1393.5,1589.04 ccw(c1417.15,1589.04) R36.4@1400.43,1572.32 ; R36.4@1397.01,1575.09 ccw(c1394.94,1589.25) 1409.25,1589.25 ; R36.4@1397.88,1569.15 ccw(c1395.95,1582.31) 1409.25,1582.31 ; R36.4@1398.83,1575.18 ccw(c1399.4,1589.11) 1409.25,1579.25 ; R36.4@1407.39,1569.34 cw(c1415.57,1572.93) 1409.25,1579.25 ; U1.79@1478.62,1960.04 1478.62,1914.68 1433.69,1869.75 1433.69,1803.61 1495,1742.31 1495,1665 1470,1640 1440,1640 1393.5,1593.5 R36.4@1393.5,1565.39 1400.39,1565.39 1400.39,1570.39 1409.25,1579.25 ; J3.8@1674.66,1638.91 ccw(c1656.26,1620.51) 1656.26,1646.53 ccw(c1656.26,1672.56) J3.8@1674.66,1654.16 ; J3.8@1700,1646.53 1560,1646.53 1538.47,1625 1445,1625 1409.25,1589.25 ; 1409.25,1579.25 1409.25,1589.25
SDIO_D2: J3.9 R35.1 U1.78 | length 1300.4
  Top Layer w6: v1@1518.38,1662.38 cw(c1499.98,1643.98) 1526,1643.98 cw(c1552.02,1643.98) v1@1533.62,1662.38 ; v1(1526,1670) 1526,1369 v1(1550,1345) ; v1@1539.22,1345 ccw(c1513.2,1345) 1531.6,1363.4 ccw(c1550,1381.8) v1@1550,1355.78
  Bottom Layer w6: R35.1@1452.56,1380 1515,1380 v1(1550,1345) 1551.61,1343.39 J3.9@1700,1343.39 ; R35.1@1457.33,1375.23 cw(c1468.85,1363.71) 1468.85,1380 cw(c1468.85,1396.29) R35.1@1457.33,1384.77 ; R35.1@1461.57,1370.99 cw(c1483.34,1349.22) 1483.34,1380 cw(c1483.34,1410.78) R35.1@1461.57,1389.01 ; U1.78@1494.37,1960.04 1494.37,1913.46 1445.69,1864.78 1445.69,1808.59 1465.65,1788.62 1511.38,1788.62 1526,1774 v1(1526,1670) ; v1@1518.38,1677.62 ccw(c1499.98,1696.02) 1526,1696.02 ccw(c1552.02,1696.02) v1@1533.62,1677.62 ; v1@1539.22,1345 ccw(c1513.2,1345) 1531.6,1363.4 ccw(c1550,1381.8) v1@1550,1355.78 ; v1@1553.38,1348.38 ccw(c1565.44,1360.44) 1565.44,1343.39 ; v1@1557.62,1337.38 cw(c1572.13,1322.87) 1572.13,1343.39 ; v1@1557.62,1352.62 ccw(c1579.92,1374.92) 1579.92,1343.39 ; J3.9@1674.66,1335.76 ccw(c1656.26,1317.36) 1656.26,1343.39 ccw(c1656.26,1369.41) J3.9@1674.66,1351.01
SDIO_D3: J3.1 R36.1 U1.77 | length 1327.7
  Top Layer w6: v1@1539.86,1393.66 ccw(c1532.37,1396.37) 1538,1402 ; v1@1542.38,1687.38 cw(c1523.98,1668.98) 1550,1668.98 cw(c1576.02,1668.98) v1@1557.62,1687.38 ; v1@1546.34,1400.14 cw(c1543.63,1407.63) 1538,1402 ; v1(1550,1390) 1538,1402 ; v1(1550,1695) 1550,1645 1538,1633 1538,1402
  Bottom Layer w6: R36.1@1386.58,1457.68 cw(c1369.86,1440.96) 1393.5,1440.96 cw(c1417.15,1440.96) R36.1@1400.43,1457.68 ; R36.1@1393.5,1464.61 1393.5,1431.5 1407,1418 1477,1418 1490,1405 1535,1405 ; U1.77@1510.12,1960.04 1510.12,1912.24 1457.69,1859.81 1457.69,1813.56 1470.62,1800.62 1559.38,1800.62 1570,1790 1570,1775 1550,1755 v1(1550,1695) ; v1@1539.35,1391.66 ccw(c1524.05,1394.05) 1535,1405 ; v1@1542.38,1702.62 ccw(c1523.98,1721.02) 1550,1721.02 ccw(c1576.02,1721.02) v1@1557.62,1702.62 ; v1@1548.34,1400.65 cw(c1545.95,1415.95) 1535,1405 ; v1(1550,1390) 1535,1405 ; v1@1553.31,1386.69 J3.1@1700,1386.69 ; v1@1553.38,1393.38 ccw(c1569.52,1409.52) 1569.52,1386.69 ; v1@1557.62,1382.38 cw(c1568.04,1371.96) 1568.04,1386.69 ; v1@1557.62,1397.62 ccw(c1584.01,1424.01) 1584.01,1386.69 ; J3.1@1674.66,1379.07 ccw(c1656.26,1360.67) 1656.26,1386.69 ccw(c1656.26,1412.72) J3.1@1674.66,1394.32
SDIO_NCD: J3.10 R34.1 U1.83 | length 1954.4
  Top Layer w6: v1@1368.04,1638.23 ccw(c1355.38,1653.22) 1375,1653.22 ; v1(1375,1630) 1375,1653.22 ; v1@1381.96,1638.23 cw(c1394.62,1653.22) 1375,1653.22 ; v1(1580,1300) 1580,1470 1645,1535 v1(1645,1695) 1583.39,1756.61 1486.61,1756.61 1457.78,1727.78 1376.56,1727.78 1363.22,1714.44 1363.22,1665 1375,1653.22 ; v1@1634.22,1695 ccw(c1608.2,1695) 1626.6,1713.4 ccw(c1645,1731.8) v1@1645,1705.78
  Bottom Layer w6: v1@1367.38,1637.62 ccw(c1348.98,1656.02) 1375,1656.02 ccw(c1401.02,1656.02) v1@1382.62,1637.62 ; v1(1375,1630) 1375,1675 1363.22,1686.78 1363.22,1714.44 1379.39,1730.61 ; 1380.36,1729.64 1385,1734.28 1385,1888.94 1415.63,1919.57 U1.83@1415.63,1960.04 U1.83@1413.61,1958.02 ; R34.1@1452.56,1320 1510,1320 1529.92,1300.08 J3.10@1700,1300.08 ; R34.1@1457.33,1315.23 cw(c1468.85,1303.71) 1468.85,1320 cw(c1468.85,1336.29) R34.1@1457.33,1324.77 ; R34.1@1461.57,1310.99 cw(c1483.34,1289.22) 1483.34,1320 cw(c1483.34,1350.78) R34.1@1461.57,1329.01 ; 1553.79,1300.08 cw(c1553.79,1273.79) v1@1572.38,1292.38 ; 1554.17,1300.08 ccw(c1554.17,1325.83) v1@1572.38,1307.62 ; v1@1587.62,1292.38 cw(c1606.21,1273.79) 1606.21,1300.08 ; v1@1587.62,1307.62 ccw(c1605.83,1325.83) 1605.83,1300.08 ; v1(1645,1695) 1650.16,1689.84 J3.10@1700,1689.84 ; v1@1648.38,1698.38 ccw(c1668.99,1718.99) J3.10@1668.99,1689.84 ; v1@1649.24,1697.21 ccw(c1663.78,1704.81) 1659.53,1688.97 ; v1@1650.39,1685.66 cw(c1659.87,1669.24) 1664.78,1687.56 ; v1@1652.62,1687.38 cw(c1658.57,1681.43) 1658.57,1689.84 ; v1@1652.62,1702.62 ccw(c1683.48,1733.48) J3.10@1683.48,1689.84 ; J3.10@1674.66,1292.46 ccw(c1656.26,1274.05) 1656.26,1300.08 ccw(c1656.26,1326.1) J3.10@1674.66,1307.7 ; J3.10@1674.66,1682.22 ccw(c1656.26,1663.82) 1656.26,1689.84 ccw(c1656.26,1715.87) J3.10@1674.66,1697.46
SPI0_CLK: U1.58 U7.13 | length 1617
  Top Layer w6: v1(1673,2105) 1674,2104 1945.06,2104 2041,2199.94 2041,2374 2030,2385 2030,2439.09 2041,2450.09 2041,2602.97 2117.78,2679.75 2117.78,2927.22 v1(2115,2930) ; v1@1676.38,2108.38 ccw(c1686.95,2118.95) 1686.95,2104 ; v1@1680.62,2097.38 cw(c1696.61,2081.39) 1696.61,2104 ; v1@1680.62,2112.62 ccw(c1701.44,2133.44) 1701.44,2104
  Bottom Layer w6: v1(1673,2105) 1699.22,2105 1716.78,2122.56 1716.78,2123.75 1718.42,2125.39 U1.58@1769.96,2125.39 ; v1@1680.62,2097.38 cw(c1699.02,2078.98) 1699.02,2105 cw(c1699.02,2131.02) v1@1680.62,2112.62 ; U7.13@2035.32,3042.72 2077.28,3042.72 2095,3025 2095,2950 v1(2115,2930) ; U7.13@2046.85,3037.88 cw(c2058.53,3026.2) 2058.53,3042.72 cw(c2058.53,3059.24) U7.13@2046.85,3047.55 ; v1@2104.22,2930 ccw(c2078.2,2930) 2096.6,2948.4 ccw(c2115,2966.8) v1@2115,2940.78
SPI0_MISO: U1.59 U7.12 | length 1641.3
  Top Layer w6: v1(1690,2075) 1728.03,2075 1745.03,2092 1950.03,2092 2053,2194.97 2053,2378.97 2042,2389.97 2042,2434.12 2053,2445.12 2053,2598 2137.78,2682.78 2137.78,2939.44 2124.44,2952.78 2092.78,2952.78 ; v1@1697.62,2067.38 cw(c1716.02,2048.98) 1716.02,2075 cw(c1716.02,2101.02) v1@1697.62,2082.62 ; v1(2075,2930) 2075,2935 2092.78,2952.78 ; v1@2075,2940.78 ccw(c2075,2954.73) 2084.87,2944.87 ; v1@2079.73,2930.67 cw(c2095.64,2932.92) 2084.28,2944.28 ; v1@2085.67,2931.51 cw(c2110.53,2935.03) 2092.78,2952.78
  Bottom Layer w6: v1(1690,2075) 1724.65,2109.65 U1.59@1769.96,2109.65 ; U7.12@2035.32,3007.28 2060,3007.28 2075,2992.28 v1(2075,2930) ; U7.12@2046.85,3002.45 cw(c2058.53,2990.76) 2058.53,3007.28 cw(c2058.53,3023.8) U7.12@2046.85,3012.12 ; v1@2067.38,2937.62 ccw(c2048.98,2956.02) 2075,2956.02 ccw(c2101.02,2956.02) v1@2082.62,2937.62
SPI0_MOSI: pad.1@1935,2965 U7.11 | length 171.7
  Bottom Layer w10: pad.1@1935,2965 1955,2985 ; pad.1@1937.52,2979.47 ccw(c1940.93,2999.07) 1955,2985 ; pad.1@1949.47,2967.52 cw(c1969.07,2970.93) 1955,2985 ; 2011.01,2983.99 ccw(c2028.62,3001.6) U7.11@2028.62,2976.69 ; U7.11@2035.32,2971.85 2023.15,2971.85 2010,2985 1955,2985
SPI0_SS: U1.57 U7.14 | length 1566.6
  Top Layer w6: v1@1694.82,2121.25 cw(c1696.2,2103.2) 1709,2116 ; v1@1695,2130 1709,2116 ; v1@1704.61,2130.07 ccw(c1720.23,2127.23) 1709,2116 ; v1@2087.38,2895.38 cw(c2068.98,2876.98) 2095,2876.98 cw(c2121.02,2876.98) v1@2102.62,2895.38 ; v1(2095,2903) 2095,2673.94 2029,2607.94 2029,2455.06 2018,2444.06 2018,2379.94 2029,2368.94 2029,2204.91 1940.09,2116 1709,2116
  Bottom Layer w6: v1(1694,2132) 1703.14,2141.14 U1.57@1769.96,2141.14 ; U7.14@2035.32,3078.15 2076.85,3078.15 2140,3015 2140,2920 2123,2903 v1(2095,2903) ; U7.14@2046.85,3073.31 cw(c2058.53,3061.63) 2058.53,3078.15 cw(c2058.53,3094.67) U7.14@2046.85,3082.99
SPI3_CLK: U1.123
SPI3_MISO: pad.1@1185,2435 U1.125 | length 117
  Bottom Layer w6: U1.125@1140.04,2471.85 1178.15,2471.85 v1(1205,2445) ; v1@1194.22,2445 ccw(c1168.2,2445) 1186.6,2463.4 ccw(c1205,2481.8) v1@1205,2455.78
SPI3_MOSI: pad.1@1185,2505 U1.126 | length 123
  Bottom Layer w6: U1.126@1140.04,2487.6 1200.6,2487.6 v1(1195,2490) ; U1.126@1163.18,2487.6 ccw(c1163.18,2521.82) v1@1187.38,2497.62 ; 1174.77,2487.6 cw(c1174.77,2469.77) v1@1187.38,2482.38 ; 1177.66,2487.6 ccw(c1177.66,2507.34) v1@1191.62,2493.38
SPI3_SS: U1.124
SPIM_CLK: U1.100 U8.6 | length 858.3
  Bottom Layer w6: U8.6@1096.3,2729 1160,2729 1177.78,2711.22 1177.78,2677.6 1147,2646.82 1147,2592.28 1200.03,2539.25 1211.91,2539.25 1251.78,2499.38 1251.78,2172.75 1219,2139.97 1219,2111 1186.15,2078.15 U1.100@1140.04,2078.15
SPIM_D2: pad.1@1128,2007 U1.97 | length 56.7
  Bottom Layer w9: pad.1@1127.71,2018.24 ccw(c1127.37,2030.9) U1.97@1140.04,2030.91 1140.04,2020.04 pad.1@1135,2015 ; pad.1@1127.94,2009.25 ccw(c1127.62,2021.67) 1140.04,2021.67
SPIM_D3: pad.1@1085,2045 U1.98 | length 71.1
  Bottom Layer w9: pad.1@1090,2035 1101.65,2046.65 ; pad.1@1094.73,2050.64 ccw(c1101.65,2054.65) 1101.65,2046.65 ; pad.1@1095.89,2042.19 cw(c1101.65,2040.7) 1101.65,2046.65 ; U1.98@1140.04,2046.65 1101.65,2046.65
SPIM_MISO: U1.101 U8.2 | length 1241.5
  Top Layer w6: v1@1147.38,2697.62 ccw(c1128.98,2716.02) 1155,2716.02 ccw(c1181.02,2716.02) v1@1162.62,2697.62 ; v1(1155,2690) 1155,2770 ; v1@1159.35,2783.34 cw(c1144.05,2780.95) 1155,2770 ; v1@1168.34,2774.35 ccw(c1165.95,2759.05) 1155,2770 ; v1(1170,2785) 1155,2770
  Bottom Layer w6: U1.101@1140.04,2093.9 1184.93,2093.9 1207,2115.97 1207,2144.94 1239.78,2177.72 1239.78,2494.41 1206.94,2527.25 1195.06,2527.25 1135,2587.31 1135,2655 ; 1142.72,2662.72 ccw(c1122.67,2682.76) v1@1150.34,2688.96 ; v1@1144.48,2687.65 cw(c1110.06,2679.94) 1135,2655 ; 1150.43,2670.43 ccw(c1135.28,2685.59) v1@1156.19,2690.27 ; v1@1151.56,2679.78 cw(c1149.95,2675) 1155,2675 ; v1(1155,2690) 1155,2675 ; v1@1158.44,2679.78 ccw(c1160.05,2675) 1155,2675 ; v1(1170,2785) 1176,2779 U8.2@1355.67,2779 ; v1@1173.38,2788.38 ccw(c1196.02,2811.02) 1196.02,2779 ; v1@1177.62,2792.62 ccw(c1210.51,2825.51) 1210.51,2779 ; 1135,2655 1155,2675
SPIM_MOSI: U1.102 U8.5 | length 726.8
  Bottom Layer w6: U8.5@1096.3,2670 cw(c1096.3,2648.27) 1111.66,2663.64 cw(c1127.03,2679) U8.5@1105.3,2679 ; U8.5@1096.3,2679 1115,2660.3 1115,2590.34 1192.56,2512.78 1204.44,2512.78 1227.78,2489.44 1227.78,2182.69 1195,2149.91 1195,2120.94 1183.7,2109.65 U1.102@1140.04,2109.65
SPIM_SS: U1.99 U8.1 | length 1115.1
  Bottom Layer w6: U1.99@1140.04,2062.4 1187.37,2062.4 1231,2106.03 1231,2135 1263.78,2167.78 1263.78,2504.35 1216.88,2551.25 1205,2551.25 1159,2597.25 1159,2641.85 1189.78,2672.63 1189.78,2716.19 1147.22,2758.75 1147.22,2795.35 1159.65,2807.78 1273.78,2807.78 1295,2829 U8.1@1355.67,2829
SWDCK: P3.5 pad.0@1040,1005 U1.66 | length 2135.4
  Top Layer w8: v1@1333.54,1417.34 ccw(c1320.97,1431.63) 1340,1431.63 ; v1(1340,1410) 1340,1431.63 ; v1@1342.22,2010 cw(c1318.61,2010) 1335.31,1993.31 cw(c1352,1976.61) v1@1352,2000.22 ; v1@1346.46,1417.34 cw(c1359.03,1431.63) 1340,1431.63 ; v1(1352,2010) 1325.78,1983.78 1325.78,1589.2 1356,1558.98 1356,1447.63 1340,1431.63
  Bottom Layer w8: pad.0@1040,1005 1220.2,1005 1356,1140.8 1356,1400 ; pad.0@1052.73,992.27 cw(c1083.46,961.54) 1083.46,1005 cw(c1083.46,1048.46) pad.0@1052.73,1017.73 ; pad.0@1058.38,986.62 cw(c1102.77,942.23) 1102.77,1005 cw(c1102.77,1067.77) pad.0@1058.38,1023.38 ; P3.5@1071.94,992.27 cw(c1102.67,961.54) 1102.67,1005 cw(c1102.67,1048.46) P3.5@1071.94,1017.73 ; P3.5@1077.6,986.62 cw(c1121.98,942.23) 1121.98,1005 cw(c1121.98,1067.77) P3.5@1077.6,1023.38 ; v1(1340,1410) 1346,1410 1356,1400 ; v1@1344.84,1401.5 cw(c1349.44,1393.44) 1356,1400 ; v1@1349.78,1410 ccw(c1358.9,1410) 1352.45,1403.55 ; v1@1358.92,2003.08 cw(c1375.61,1986.39) 1375.61,2010 cw(c1375.61,2033.61) v1@1358.92,2016.92 ; v1@1360,2010 1380,2010 1410,2040 1646.82,2040 1683.35,2003.47 U1.66@1683.35,1960.04
SWDIO: P3.4 pad.1@1040,905 U1.65 | length 2182
  Top Layer w8: v1@1368.5,1426.5 v1@1370,1425 ; v1(1370,1428) 1370,1564.78 1339.78,1595 1339.78,1964.15 1375.78,2000.15 1375.78,2044.78 ; v1@1377.01,2051.15 cw(c1371.69,2048.87) 1375.78,2044.78 ; v1@1382.15,2046.01 ccw(c1379.87,2040.69) 1375.78,2044.78 ; v1(1386,2055) 1375.78,2044.78
  Bottom Layer w8: pad.1@1040,905 1140,905 1370,1135 v1(1370,1428) ; pad.1@1052.73,892.27 cw(c1083.46,861.54) 1083.46,905 cw(c1083.46,948.46) pad.1@1052.73,917.73 ; pad.1@1058.38,886.62 cw(c1102.77,842.23) 1102.77,905 cw(c1102.77,967.77) pad.1@1058.38,923.38 ; P3.4@1071.94,892.27 cw(c1102.67,861.54) 1102.67,905 cw(c1102.67,948.46) P3.4@1071.94,917.73 ; P3.4@1077.6,886.62 cw(c1121.98,842.23) 1121.98,905 cw(c1121.98,967.77) P3.4@1077.6,923.38 ; v1@1363.08,1421.08 cw(c1346.39,1404.39) 1370,1404.39 cw(c1393.61,1404.39) v1@1376.92,1421.08 ; v1@1385,2055 v1(1386,2055) 1651.62,2055 1699.09,2007.52 U1.65@1699.09,1960.04 ; v1@1392.92,2048.08 cw(c1409.61,2031.39) 1409.61,2055 cw(c1409.61,2078.61) v1@1392.92,2061.92
U1RX: pad.1@1080,2635 U1.128 | length 173.9
  Bottom Layer w9: pad.1@1071.44,2622.46 cw(c1060.37,2606.25) 1080,2606.25 ; pad.1@1080,2630 1080,2606.25 ; pad.1@1088.56,2622.46 ccw(c1099.63,2606.25) 1080,2606.25 ; U1.128@1140.04,2519.09 1140.04,2546.21 1080,2606.25
U1TX: pad.1@1093,2545 U1.127 | length 147.7
  Bottom Layer w9: 1080,2512.31 cw(c1097.87,2512.31) pad.1@1095.24,2529.98 ; 1080,2522.75 cw(c1096.32,2522.75) pad.1@1093.91,2538.88 ; pad.1@1090,2545 1080,2535 1080,2515 1091.65,2503.35 U1.127@1140.04,2503.35
U4RX: pad.1@1618,2665 U1.29 | length 130.9
  Bottom Layer w9: pad.1@1618,2653.75 cw(c1618,2621.77) 1640.62,2644.38 ; pad.1@1620,2665 1651.85,2633.15 U1.29@1651.85,2589.96 ; pad.1@1629.25,2665 ccw(c1651.57,2665) 1635.79,2649.21
U4TX: pad.1@1745,2590 U1.28 | length 332.3
  Bottom Layer w9: U1.28@1636.1,2589.96 1636.1,2543.9 1650,2530 1700,2530 1745,2575 pad.1@1745,2585 ; 1701.75,2531.75 ccw(c1643.5,2590) pad.1@1725.88,2590 ; 1717.11,2547.11 ccw(c1674.23,2590) pad.1@1734.88,2590 ; 1732.48,2562.48 ccw(c1704.96,2590) pad.1@1743.88,2590